# Altium PCB PCB1.PcbDoc
Units mil, origin at the board's own origin, x right, y up, seen from the top; angles counter-clockwise.
Board outline 7111 x 3801 mil, 2 copper layers (Top Layer, Bottom Layer); 57 components, 63 nets, 218 pads, 30 vias.
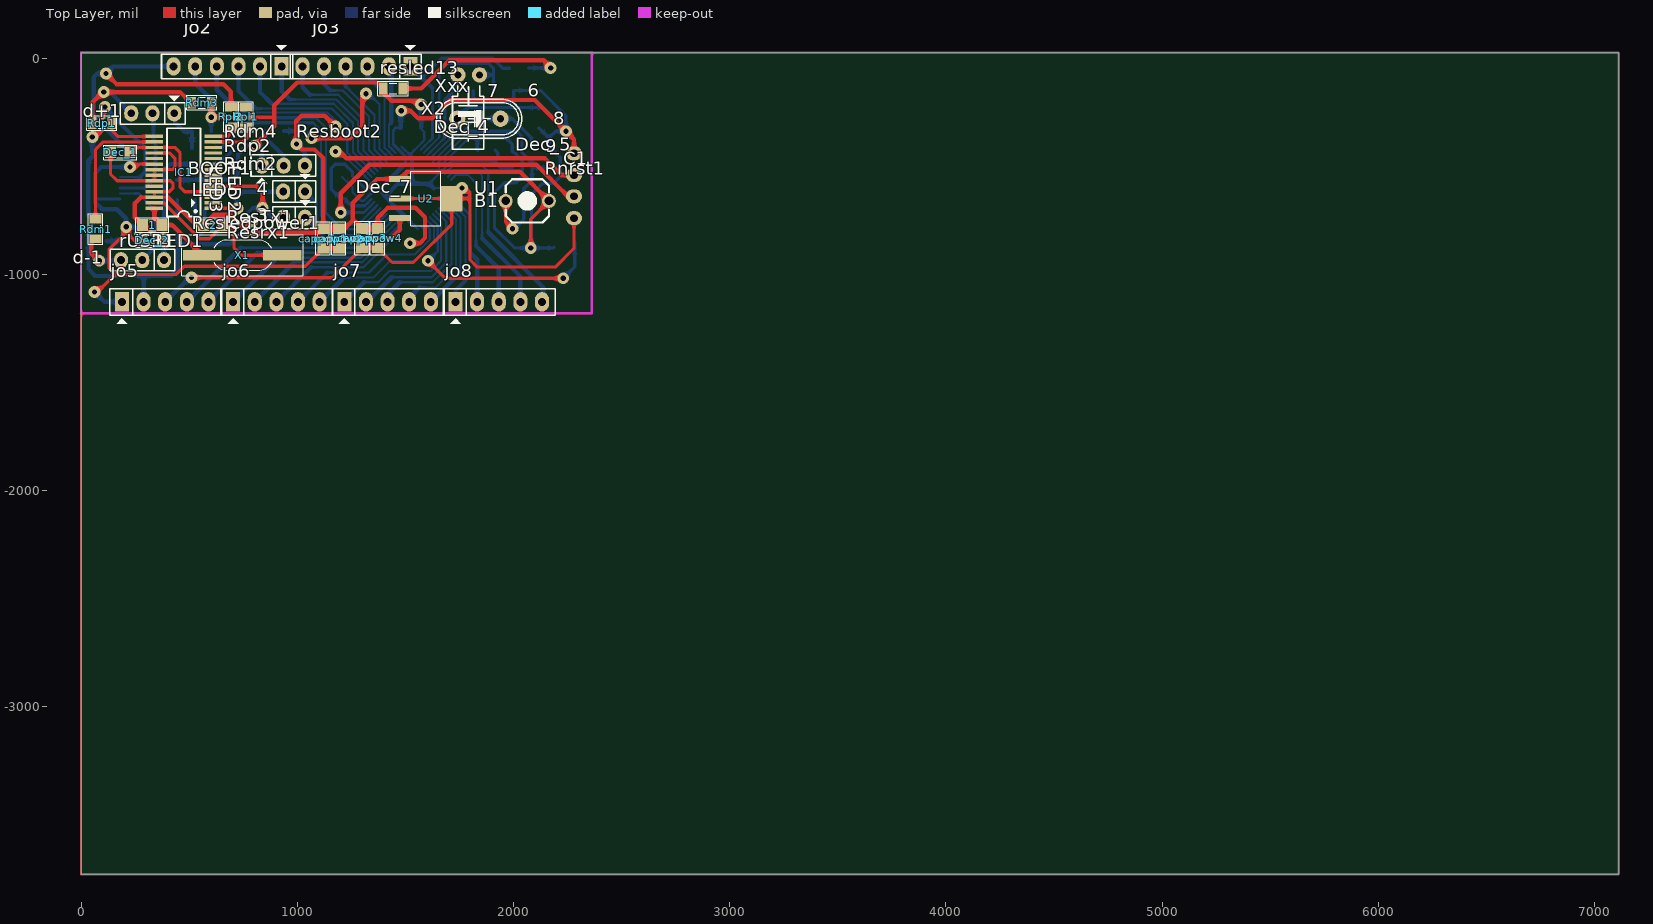
[diagram p0: Top Layer view]
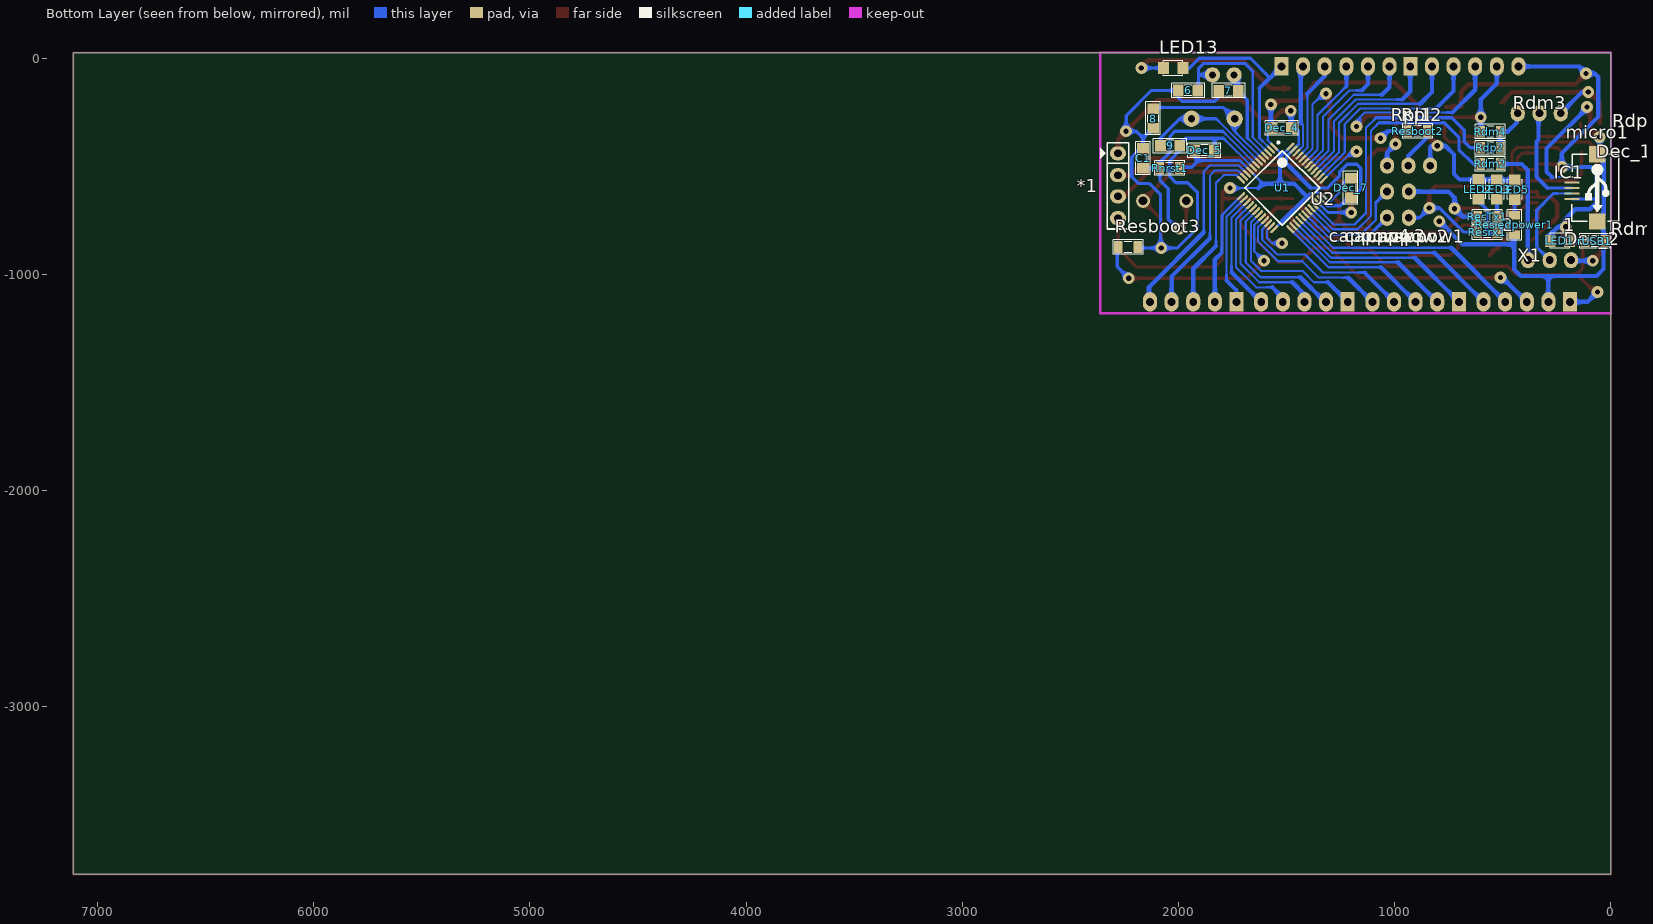
[diagram p1: Bottom Layer view, seen from below]
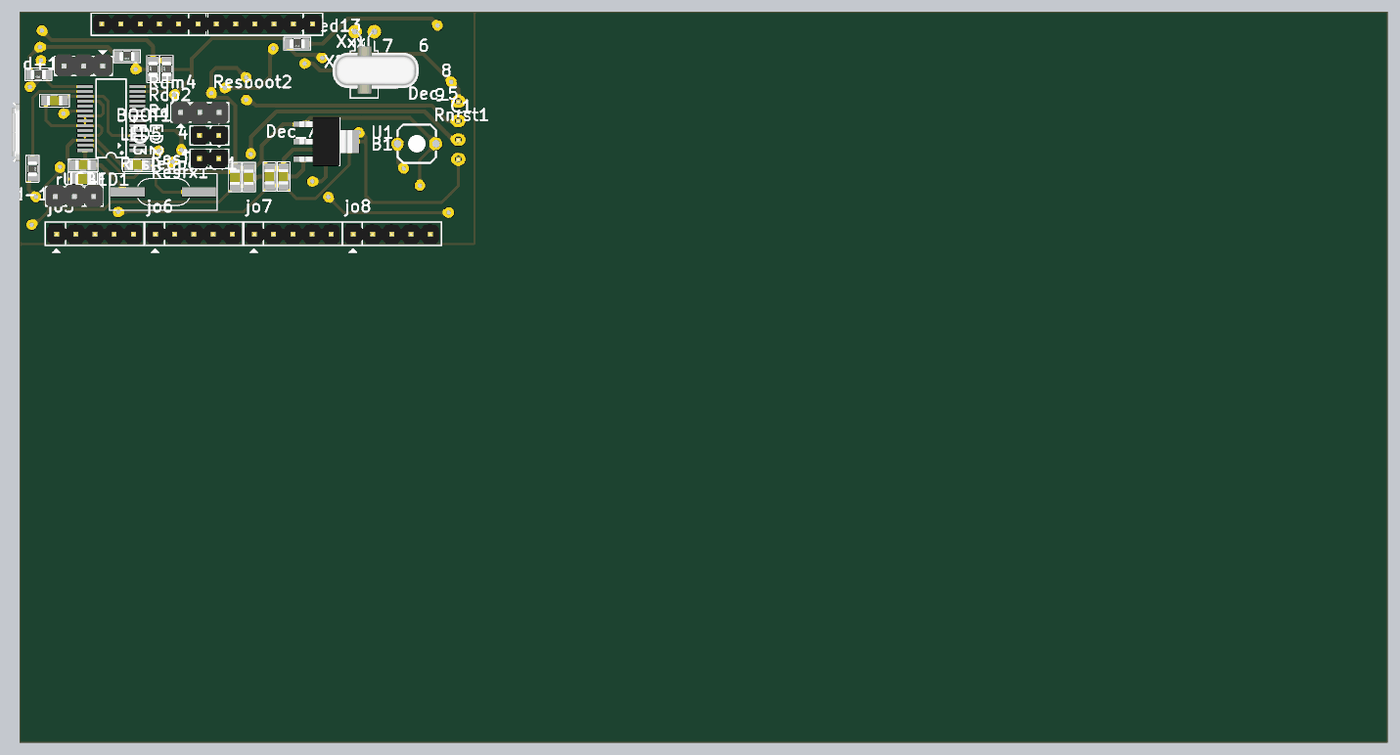
[diagram p2: 3D render of the assembled board from above, using the file's embedded part models]
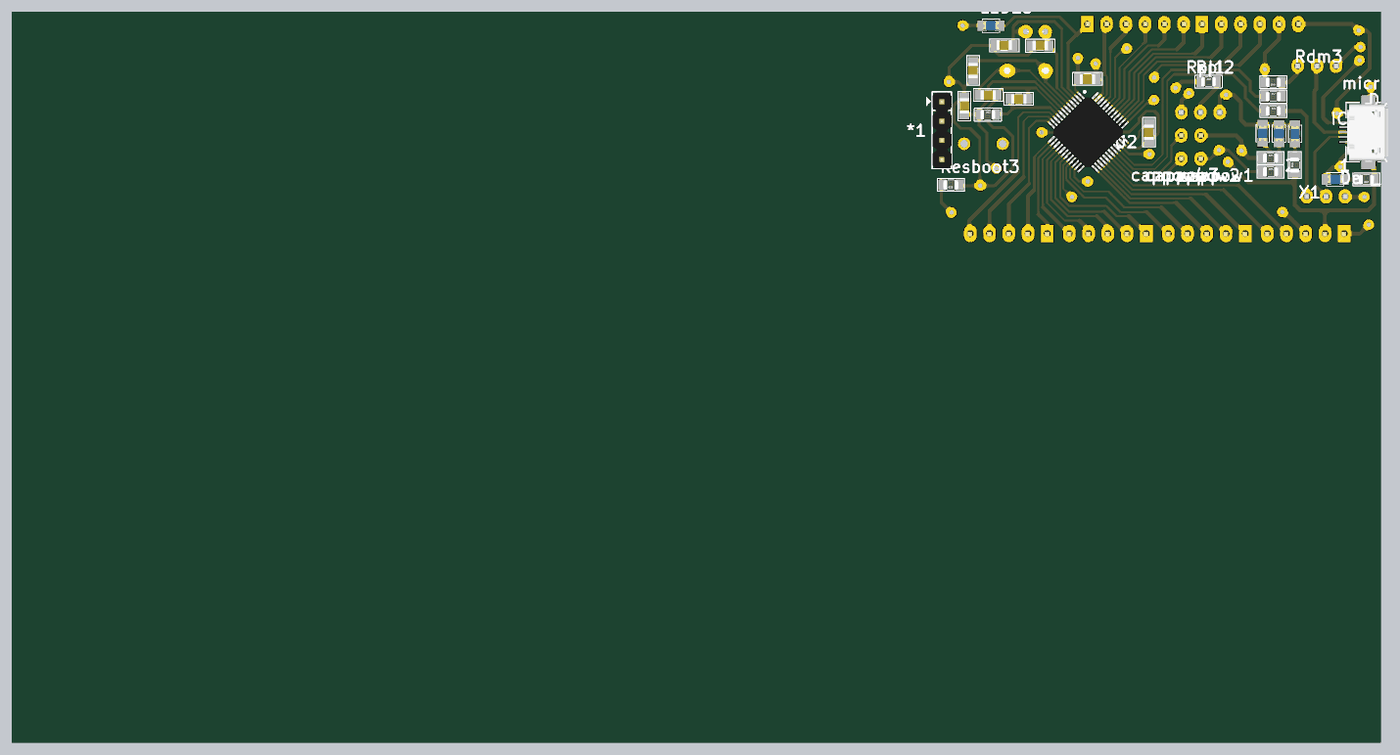
[diagram p3: 3D render of the assembled board from below, using the file's embedded part models]

## Layer stack, top to bottom
Top Solder: solder mask 0.4, Solder Resist, Dk 3.5
Top Layer: signal copper 1.4
Dielectric 1: dielectric 12.6, FR-4, Dk 4.8
Bottom Layer: signal copper 1.4
Bottom Solder: solder mask 0.4, Solder Resist, Dk 3.5

## Board outline
0,-2550 0,26 7111,26 7111,-3775 0,-3775

## Design rules (kind name [scope] priority, off if disabled: settings)
Clearance [All] p1: gap=1
PolygonConnect [All] p1: connectstyle=Relief reliefconductorwidth=10 reliefentries=4 polygonreliefangle="90 Angle" airgapwidth=10
RoomDefinition Sheet1 [InComponentClass('Sheet1')] p1: confinementstyle=ConfineIn formatcopy=TRUE lockcomponents=FALSE outline 2423,274 2691,274 2691,1009 2423,1009
RoutingVias [All] p1: holewidth=24 width=55 viastyle="Through Hole" minholewidth=24 minwidth=55 maxholewidth=24 maxwidth=55
SolderMaskExpansion [All] p1: expansion=4
UnpouredPolygon [All] p1: allowunpoured=FALSE
Width [All] p1: maxlimit=40 minlimit=10 preferedwidth=15
29 further rules are at their usual default settings.

## Components (designator, comment, footprint, x,y, rotation, side; value= is the part's Value field where it differs from the comment)
1 "Tu 0805 22p" "Tu 0805" 329,-772 r180 top
2 "Tu 0805 22p" "Tu 0805" 612,-772 r180 top
3 "Jumper 2" JP2 1036,-738 r180 top
4 "Jumper 2" JP2 1036,-617 r180 top
6 "22p" "Tu 0805" 1956,-149 r0 bottom
7 "22p" "Tu 0805" 1769,-151 r0 bottom
8 "22p" "Tu 0805" 2117,-279 r270 bottom
9 "22p" "Tu 0805" 2039,-405 r180 bottom
*1 "JP4" JP4 2280,-540 r270 bottom
B1 "Button" "Button 2 Pin" 2064,-660 r180 top
BOOT1 "JP 2-1" JP3 936,-497 r0 top
C1 "Tu 0805" "Tu 0805" 2164,-463 r90 bottom
cappow1 "103" "Tu 0805" 1120,-834 r270 top
cappow2 "104" "Tu 0805" 1192.33,-834 r270 top
cappow3 "104" "Tu 0805" 1299.67,-832 r270 top
cappow4 "103" "Tu 0805" 1372,-832 r270 top
d+1 "JP 2-1" JP3 331,-255 r180 top
d-1 "JP 2-1" JP3 284,-934 r180 top
Dec_1 "104" "Tu 0805" 181,-435 r0 top
Dec_2 "104" "Tu 0805" 328,-841 r0 top
Dec_4 "104" "Tu 0805" 1523,-322 r180 bottom
Dec_5 "104" "Tu 0805" 1880,-426 r180 bottom
Dec_7 "104" "Tu 0805" 1203,-600 r270 bottom
IC1 "PL2303HX" SO-G28/C6.8 475,-528 r90 top
jo2 "JP6 PINssc" JP6 928,-38 r180 top
jo3 "JP6 PIN" JP6 1524,-38 r180 top
jo5 "JP5" JP5 189,-1127 r0 top
jo6 "JP5" JP5 703.33,-1127 r0 top
jo7 "JP5" JP5 1217.67,-1127 r0 top
jo8 "JP5" JP5 1732,-1127 r0 top
LED1 "LED SMD" SM-LED-0805-Blue 281,-845 r180 bottom
LED2 "LED SMD" SM-LED-0805-Blue 613,-561 r270 bottom
LED3 "LED SMD" SM-LED-0805-Blue 528,-562 r270 bottom
LED5 "LED SMD" SM-LED-0805-Blue 445,-563 r270 bottom
LED13 "LED SMD" SM-LED-0805-Blue 2070,-46 r180 bottom
micro1 "USB-5" USB-M1 180,-600 r270 bottom
Rdm1 "22" RES-SMD-0805 67,-790 r270 top
Rdm2 "22" RES-SMD-0805 558,-489 r180 bottom
Rdm3 "22" RES-SMD-0805 558,-206 r180 top
Rdm4 "22" RES-SMD-0805 558,-340 r0 bottom
Rdp1 "22" RES-SMD-0805 96,-300 r180 top
Rdp2 "22" RES-SMD-0805 558,-414 r180 bottom
Resboot2 "10k" RES-SMD-0805 894,-337 r180 bottom
Resboot3 "10k" RES-SMD-0805 2233,-874 r0 bottom
resled13 "470" RES-SMD-0805 1443,-140 r180 top
Resledpower1 "470" RES-SMD-0805 447,-771 r90 bottom
Resrx1 "470" RES-SMD-0805 572,-805 r180 bottom
ResTx1 "470" RES-SMD-0805 572,-734 r180 bottom
Rnrst1 "Res" RES-SMD-0805 2041,-508 r180 bottom
Rpl1 "10k" RES-SMD-0805 763,-271 r90 top
Rpl2 "10k" RES-SMD-0805 693,-271 r90 top
rUSB1 "470" RES-SMD-0805 74,-846 r0 bottom
U1 "STM32F101C6T6" TQFP48 1520,-600 r225 bottom
U2 "LM1117-3.3V" LM1117-SOP 1524,-649 r270 top
X1 "12mhz" XT2-SMD 741,-911 r180 top
X2 "32k768" XT32k 1843,-77 r270 top
Xxx "8mhzdip" XT2 1840,-280 r180 top

## Footprints (in the part's own frame and the unit in brackets; to place one, negate y for a bottom-side part, rotate by r counter-clockwise, add the part's x,y. Pads: shape width x height; smd on the part's side, far side on the other; paste and mask are expansions set on the pad)
"Button 2 Pin" [mil] "Button 200mil 2 Pin"
  round 65 hole 40: 1(-100,0) 2(100,0)
  silkscreen extent -100,-100 100,100
JP2 [mil]
  oval 65x75 hole 36: 1(0,0) 2(101,0)
  silkscreen extent -50,-81 150,50, body extent -48,-50 148,48, height 323
JP3 [mil] "Jumper 3"
  oval 65x75 hole 36: 1(-100,0) 2(1,0) 3(99,0)
  silkscreen extent -150,-81 150,50, body extent -150,-60 150,55, height 355
JP4 [mil] "Jumper 4"
  oval 65x75 hole 36: 1(-100,0) 2(1,0) 3(99,0) 4(200,0)
  silkscreen extent -150,-81 250,50, body extent -148,-48 248,50, height 323
JP5 [mil] "JP5"
  rect 65x90 hole 36: 1(0,0)
  oval 65x90 hole 36: 2(100,0) 3(200,0) 4(300,0) 5(400,0)
  silkscreen extent -57,-101 461,60, body extent -48,-53 448,45, height 323
JP6 [mil] "JP6"
  rect 65x85 hole 36: 1(0,0)
  oval 65x85 hole 36: 2(100,0) 3(200,0) 4(300,0) 5(400,0) 6(500,0)
  silkscreen extent -50,-99 556,58, body extent -48,-50 548,48, height 323
LM1117-SOP [mm]
  rect 0.7x2.54 smd: 1(-2.3,-1.27) 2(0,-1.27) 3(2.3,-1.27)
  rect 3x2.54 smd: 2(0,4.826)
  silkscreen extent -3.18,0 3.17,3.56, body extent -3.25,-1.78 3.25,5.18, height 1.68
RES-SMD-0805 [mil]
  rect 39.37x55 smd: 1(-45,0) 2(45,0)
  silkscreen extent -70,-34 70,33, body extent -39,-25 39,25, height 31
SM-LED-0805-Blue [mil]
  rect 50x55 smd: 1(0,0) 2(90,0)
  silkscreen extent 0,-35 90,35, body extent 5,-25 85,25, height 43
SO-G28/C6.8 [mm] "SSOP, Plastic; 28 Leads; Body Width 5.3 mm; Pitch 0.65 mm"
  rect 0.4x2.05 smd: 1(-4.225,-3.451) 2(-3.575,-3.451) 3(-2.925,-3.451) 4(-2.275,-3.451) 5(-1.625,-3.451) 6(-0.975,-3.451) 7(-0.325,-3.451) 8(0.325,-3.451) 9(0.975,-3.451) 10(1.625,-3.451) 11(2.275,-3.451) 12(2.925,-3.451) 13(3.575,-3.451) 14(4.225,-3.451) 15(4.225,3.451) 16(3.575,3.451) 17(2.925,3.451) 18(2.275,3.451) 19(1.625,3.451) 20(0.975,3.451) 21(0.325,3.451) 22(-0.325,3.451) 23(-0.975,3.451) 24(-1.625,3.451) 25(-2.275,3.451) 26(-2.925,3.451) 27(-3.575,3.451) 28(-4.225,3.451)
  silkscreen extent -5.18,-1.97 5.17,1.98, body extent -5.16,-3.45 5.26,3.43, height 1.27
TQFP48 [mm] "TQFP, 48-Leads, Body 7.00x7.00mm, Pitch 0.50mm, IPC High Density"
  oval 1.2x0.3 smd: 1(-4.1,2.75) 2(-4.1,2.25) 3(-4.1,1.75) 4(-4.1,1.25) 5(-4.1,0.75) 6(-4.1,0.25) 7(-4.1,-0.25) 8(-4.1,-0.75) 9(-4.1,-1.25) 10(-4.1,-1.75) 11(-4.1,-2.25) 12(-4.1,-2.75) 25(4.1,-2.75) 26(4.1,-2.25) 27(4.1,-1.75) 28(4.1,-1.25) 29(4.1,-0.75) 30(4.1,-0.25) 31(4.1,0.25) 32(4.1,0.75) 33(4.1,1.25) 34(4.1,1.75) 35(4.1,2.25) 36(4.1,2.75)
  oval 0.3x1.2 smd: 13(-2.75,-4.1) 14(-2.25,-4.1) 15(-1.75,-4.1) 16(-1.25,-4.1) 17(-0.75,-4.1) 18(-0.25,-4.1) 19(0.25,-4.1) 20(0.75,-4.1) 21(1.25,-4.1) 22(1.75,-4.1) 23(2.25,-4.1) 24(2.75,-4.1) 37(2.75,4.1) 38(2.25,4.1) 39(1.75,4.1) 40(1.25,4.1) 41(0.75,4.1) 42(0.25,4.1) 43(-0.25,4.1) 44(-0.75,4.1) 45(-1.25,4.1) 46(-1.75,4.1) 47(-2.25,4.1) 48(-2.75,4.1)
  silkscreen extent -4.22,-3.1 3.1,3.57, body extent -4.5,-4.5 4.5,4.5, height 1.45
"Tu 0805" [mil] "Compoment SMD 80x50mil"
  rect 50x55 smd: 1(-45,0) 2(45,0)
  silkscreen extent -77,-34 76,33, body extent -40,-27 40,23, height 24
USB-M1 [mil]
  rect 10x70 smd: 1(51.18,0) 2(25.59,0) 3(0,0) 4(-25.59,0) 5(-50,0)
  rect 74.8x74.8 smd: 5(-155.51,116.84) 5(155.51,116.84)
  silkscreen extent -155,-1 155,215, body extent -157,5 158,218, height 107
XT2 [mil] "Footpin for Crystal 2 pin"
  round 75 hole 34: 1(-100,0) 2(100,0)
  silkscreen extent -198,-90 195,90, body extent -233,-93 213,90, height 138
XT2-SMD [mm]
  rect 4.5x1.2 smd: 1(-4.826,0) 2(4.572,0)
  silkscreen extent -7.24,-2.41 6.99,2.41, body extent -6.53,-2.41 6.27,2.42, height 4.3
XT32k [mm]
  round 1.8 hole 0.813: 1(0,0) 2(0,-2.54)
  silkscreen extent 1.27,-3.17 8.76,0.51, body extent -0.15,-2.42 8.2,-0.12, height 1.95

## Part data
1 2 6 7 8 9 C1 cappow1 cappow2 cappow3 cappow4 Dec_1 Dec_2 Dec_4 Dec_5 Dec_7: library part "CAP 0805"
3 4: library part "JP 2"
B1: library part "Button 2 Pin", "Button 2 pin"
BOOT1 d+1 d-1: library part "JP 2-1_1", "Jumper 2-1"
IC1: "USB - RS232 Converter"
jo2: library part JP6, "JP6 PIN"
jo3: library part JP6
LED1 LED2 LED3 LED5 LED13: library part LED-SMD-0805
Rdm1 Rdm2 Rdm3 Rdm4 Rdp1 Rdp2 Resboot2 Resboot3 resled13 Resledpower1 Resrx1 ResTx1 Rnrst1 Rpl1 Rpl2 rUSB1: library part Res-SMD, "Resistor"
U1: "STM32 ARM-based 32-bit MCU with 32 Kbytes Flash, 48-pin LQFP, Industrial Temperature"
U2: library part LM1117, "800mA Low-Dropout Linear Regulator"
X1 X2: library part XT2, "Crystal, 32.768 KHz, -40 to 85 degC, 3.2 x 1.5 x 0.9 mm SMD"
Xxx: library part XT2, "Crystal For all Crystal 2pin."

## Via types
v1: diameter 55, hole 24, Top Layer to Bottom Layer, 30 vias

## Nets (pads, with @x,y where several pads share a name; then routed paths per layer and width w, separated by ;. In a path a pad name is that pad's centre, name@x,y a point inside that pad or via, vN(x,y) a via of type N, cw(c..) or ccw(c..) an arc to the next point about the centre after c; other vN are vias at no path point)
3V3: *1.4 BOOT1.1 cappow3.2 cappow4.2 Dec_4.1 Dec_5.1 Dec_7.1 jo2.5 jo5.3 LED2.1 LED3.1 LED5.1 Rdm3.1 Rdm4.2 resled13.2 Rnrst1.2 U1.1 U1.9 U1.24 U1.36 U1.48 U2.2 | length 7143.7
  Top Layer w10: v1(602,-273) 603,-272 Rdm3.1 ; 1370,-112 resled13.2 resled13.2@1398,-159
  Top Layer w15: v1(511,-1015) 1161.67,-1015 cappow3.2 cappow4.2 1440,-945 1536,-945 1714,-767 U2.2@1714,-649 ; v1(602,-273) 895,-273 ; U2.2@1472,-651 1474,-649 U2.2@1714,-649 ; v1(1762,-601) 1777,-601 1799,-623 1799,-932 1833,-966 2194,-966 2280,-880 *1.4 ; 1799,-649 U2.2@1714,-649
  Top Layer w20: v1(803,-405) 894,-314 894,-218 1000,-112 1370,-112 ; resled13.2@1398,-159 1436,-197 1556,-197 v1(1573,-214)
  Bottom Layer w10: LED3.1@527,-563 LED3.1 ; Rdm4.2@602,-339 Rdm4.2 ; LED2.1@612,-562 LED2.1 ; Dec_7.1@1208,-550 1256,-598 1256,-620.89 1294.11,-659 1307.89,-659 U1.36 1345.89,-621 1387.89,-621 1406.44,-639.56 ; U1.48 1520.11,-447 ; 1522.94,-756.06 U1.24 ; 1531,-457.89 1520.11,-447 ; Dec_4.1@1573,-317 Dec_4.1 1587,-341 1587,-379.89 U1.1 1534.89,-432 1535.11,-432 1520.11,-447 ; 1609.6,-580 U1.9 1716.6,-473 ; 1630.6,-601 1631.6,-600 1632.6,-601 v1(1762,-601)
  Bottom Layer w15: Rdm4.2@602,-339 v1(602,-273) ; 1716.6,-473 1908,-473 ; Dec_5.1@1915,-425 1927,-437 1927,-454 1908,-473 ; Rnrst1.2@1996,-504 1939,-504 1908,-473
  Bottom Layer w20: jo5.3 501,-1015 v1(511,-1015) ; LED5.1 LED3.1@527,-563 ; LED3.1 LED2.1@612,-562 ; jo2.5 528,-117 602,-191 v1(602,-273) ; LED2.1 700,-561 726,-535 726,-445 766,-405 v1(803,-405) 829,-405 836,-412 BOOT1.1 ; 1522.94,-756.06 1406.44,-639.56 1466.02,-580 1531,-580 ; 1531,-457.89 1531,-580 ; Dec_4.1@1573,-317 v1(1573,-214) ; 1630.6,-601 1609.6,-580 1531,-580
5V: cappow1.2 cappow2.2 Dec_2.1 IC1.20 jo2.6 jo5.1 LED1.1 micro1.1 Rpl1.2 Rpl2.2 U2.3 | length 4577.8
  Top Layer w15: v1(62,-1081) 77,-1081 158,-1000 ; v1(209,-780) v1@209,-805 ; v1(227,-503) 254,-503 267.39,-489.61 IC1.20 ; Dec_2.1 280,-844 248,-844 v1@209,-805 ; cappow2.2 cappow1.2 1037,-962 478,-962 440,-1000 158,-1000 ; 158,-1000 130,-972 130,-884 v1@209,-805
  Top Layer w20: v1(115,-71) 164,-120 658,-120 693,-155 Rpl2.2 Rpl1.2 ; cappow2.2 1240.33,-831 1437,-831 1474,-794 U2.3
  Bottom Layer w15: 66,-651.18 micro1.1
  Bottom Layer w20: v1(62,-1081) 108,-1127 jo5.1 ; 66,-651.18 66,-667 98,-699 165,-699 209,-743 v1(209,-780) 245,-780 283,-818 283,-843 LED1.1 ; 66,-643 66,-531 94,-503 v1(227,-503) 227,-439 58,-270 58,-88 75,-71 v1(115,-71) 148,-38 jo2.6
BOOT0: Resboot2.1 U1.44 | length 909
  Top Layer w15: v1@1301,-181 v1(1318,-164)
  Top Layer w20: v1(1066,-370) 1244,-370 1301,-313 v1@1301,-181
  Bottom Layer w10: v1(1318,-164) 1331,-164 1380,-213 1380,-418.24 U1.44
  Bottom Layer w20: Resboot2.1 1033,-337 v1(1066,-370)
BOOT1: Resboot3.2 U1.20 | length 1086.9
  Top Layer w15: v1(1604,-937) 1685,-1018 v1(2230,-1018)
  Bottom Layer w10: v1(1604,-937) 1606,-937 1650,-893 1650,-771.76 U1.20
  Bottom Layer w15: v1(2230,-1018) 2283,-965 Resboot3.2@2283,-850
D+: d+1.2 micro1.3 | length 482.9
  Bottom Layer w15: micro1.3 293,-600
  Bottom Layer w20: 293,-600 344,-549 344,-386 335,-377 d+1.2@335,-255
D-: d-1.2 micro1.2 | length 450.9
  Bottom Layer w10: micro1.2 265.59,-625.59
  Bottom Layer w15: 265.59,-625.59 343,-703 343,-874 d-1.2
GND: 1.2 2.2 6.2 7.2 8.2 9.2 *1.1 B1.1 BOOT1.3 C1.2 cappow1.1 cappow2.1 cappow3.1 cappow4.1 Dec_1.1 Dec_2.2 Dec_4.2 Dec_5.2 Dec_7.2 IC1.18 IC1.21 IC1.22 IC1.23 IC1.25 IC1.26 jo2.4 jo5.2 micro1.5 Resboot3.1 Resledpower1.1 rUSB1.1 U1.8 U1.23 U1.35 U1.47 U2.1 | length 13252.4
  Top Layer w10: v1(52,-364) 53,-365 v1@65,-365 ; 1.2 1.2@294,-772 ; IC1.25 IC1.26 402.16,-643.16 ; IC1.23 IC1.22 IC1.21 ; Dec_2.2@363,-841 Dec_2.2 ; cappow2.1@1210,-789 cappow2.1 cappow2.1@1218,-789 ; 1257,-750 1262.67,-750
  Top Layer w15: Dec_1.1 136,-536 166.39,-566.39 IC1.23 413.39,-566.39 425,-578 425,-601 408.43,-617.57 IC1.25 ; 276.84,-643.16 IC1.26 ; 1.2@294,-772 Dec_2.2@363,-841 ; IC1.21 422.8,-515.2 434,-504 434,-462 410.43,-438.43 IC1.18 ; v1(2080,-878) 2080,-744 B1.1
  Top Layer w20: v1@65,-365 96,-334 96,-240 v1(110,-226) ; 276.84,-643.16 249,-671 249,-737 1.2 ; 402.16,-643.16 531,-772 2.2 615,-724 689,-724 756.5,-791.5 ; v1(794,-754) 757,-791 773,-807 1102,-807 cappow1.1 ; v1(1177,-316) 1127,-266 1019,-266 996,-289 v1(996,-397) 1021,-422 1080,-422 1120,-462 cappow1.1 ; cappow2.1 cappow1.1 ; cappow2.1@1218,-789 1257,-750 1257,-670 1368.55,-558.45 U2.1 1506.95,-525.5 2029.5,-525.5 B1.1 ; 1262.67,-750 cappow3.1 cappow4.1 1372,-738 1419,-691 1546,-691 1591,-736 1591,-832 1567,-856 v1(1521,-856) ; v1(1481,-243) 1524,-243 1559,-278 1623,-278 1708,-193 2098,-193 v1(2243,-338) 2280,-375 *1.1
  Bottom Layer w10: v1@110,-230 v1(110,-226) ; micro1.5@180,-550 273,-550 ; jo5.2 jo5.2@290,-1126 ; 733,-251 1138,-251 1177,-290 v1(1177,-316) ; 1311.73,-683 U1.35 ; 1444,-398.73 1444,-334 1456,-322 Dec_4.2 ; v1@1478,-246 v1(1481,-243) ; v1(1521,-856) 1566,-856 1591,-831 1591,-796.28 U1.23 ; U1.8 1791.76,-370
  Bottom Layer w15: 1311.73,-683 1251,-683 1216.5,-648.5 1199.5,-648.5 1157,-606 1157,-509 1175,-491 1220,-491 1256,-527 1256,-547 1309,-600 1388,-600 ; 1444,-398.73 1501.14,-455.86 1501.14,-486.86 1485.5,-502.5 ; 1791.76,-370 1833,-370 ; 7.2 1814,-180 1833,-199 1984,-199 2001,-182 6.2 2125,-149 2242,-266 2242,-337 v1(2243,-338) 2195,-338 2164,-369 ; Dec_5.2 1833,-424 1833,-370 ; 9.2@1993,-405 1993,-396 1967,-370 1833,-370 ; 9.2 1994,-427 2041,-474 2041,-547 2012,-576 1958,-576 1912,-622 1912,-785 2005,-878 v1(2080,-878) ; 8.2 2119,-324 2164,-369 ; Resboot3.1 2184,-878 v1(2080,-878) ; v1(2080,-878) 2083,-875 2083,-631 2134,-580 2184,-580 2216,-548 2216,-459 2175,-418 C1.2 2164,-369
  Bottom Layer w20: v1(52,-364) 52,-433.33 63.16,-444.49 33,-474.65 33,-725.35 63.16,-755.51 34,-784.67 34,-975 66,-1007 290,-1007 ; v1@110,-230 298,-418 298,-525 273,-550 ; jo5.2@290,-1126 290,-1007 ; Resledpower1.1 447,-861 ; jo2.4 628,-146 733,-251 ; v1(794,-754) 687,-861 447,-861 ; v1(996,-397) 1035,-436 BOOT1.3 ; 1388,-600 1485.5,-502.5 ; Dec_4.2 v1@1478,-246 ; 290,-1007 417,-1007 447,-977 447,-861
LEDSIGN: jo3.1 LED13.2 U1.2 | length 913.2
  Bottom Layer w10: U1.2 1625,-369.72 ; 1584,-98 1584,-83
  Bottom Layer w15: 1584,-83 1667,0 1904,0 1950,-46 LED13.2 ; 1625,-369.72 1625,-138
  Bottom Layer w20: jo3.1 1584,-98 ; 1585,-98 1625,-138
Net1_1: 1.1 IC1.28 X1.2 | length 336.7
  Top Layer w20: IC1.28 339.14,-737.14 1.1 422,-772 X1.2
Net2_1: 2.1 IC1.27 X1.1 | length 793
  Top Layer w15: IC1.27 382.75,-668.75 549,-835 594,-835 2.1 686,-772 707,-793 707,-876 742,-911 X1.1
Net3_1: 3.1 U1.30 | length 472.5
  Bottom Layer w10: 1143,-845 1288.92,-845 U1.30
  Bottom Layer w15: 3.1 1143,-845
Net4_1: 4.1 U1.31 | length 538.3
  Bottom Layer w10: 1088,-669 1088,-748 1158,-818 1288,-818 1368,-738 1368.08,-738 U1.31
  Bottom Layer w15: 4.1 1088,-669
Net6_1: 6.1 U1.3 X2.1 | length 849.1
  Bottom Layer w10: U1.3 1657,-365.56 1657,-61
  Bottom Layer w15: 1657,-61 1694,-24 1883,-24 1908,-49 1908,-78 ; X2.1 1907,-77 1908,-78 ; 6.1 1908,-146 1908,-78
Net7_1: 7.1 U1.4 X2.2 | length 433.6
  Bottom Layer w10: U1.4 1682,-368.4
  Bottom Layer w15: 1682,-368.4 1682,-193 7.1 1724,-96 X2.2
NetBOOT1_2: BOOT1.2 Resboot2.2 | length 196.5
  Bottom Layer w20: Resboot2.2 849,-365 937,-453 BOOT1.2
Netd+1_1: d+1.1 Rdm4.1 Rdp2.2 | length 211.8
  Bottom Layer w20: d+1.1@435,-255 435,-297 478,-340 Rdm4.1 Rdp2.2
Netd+1_3: d+1.3 Rdm3.2 Rdp1.2 | length 756.8
  Top Layer w10: Rdm3.2@505,-206 Rdm3.2@505,-205
  Top Layer w20: Rdp1.2 51,-206 100,-157 457,-157 Rdm3.2@505,-205
  Bottom Layer w20: v1(105,-157) 134,-157 d+1.3
Netd-1_1: d-1.1 Rdm2.2 | length 557
  Bottom Layer w20: d-1.1 384,-518 413,-489 Rdm2.2
Netd-1_3: d-1.3 Rdm1.2 | length 231.2
  Top Layer w20: Rdm1.2 47,-855 47,-900 v1(84,-937)
  Bottom Layer w10: d-1.3@174,-937 181,-930 d-1.3
  Bottom Layer w20: v1(84,-937) d-1.3@174,-937
NetIC1_13: IC1.13 Rpl1.1 | length 222.4
  Top Layer w15: IC1.13 747.75,-387.25 770,-365 Rpl1.1@770,-311
NetIC1_14: IC1.14 Rpl2.1 | length 119.8
  Top Layer w15: IC1.14 679.34,-361.66 693,-348 Rpl2.1
NetLED1_2: LED1.2 rUSB1.2 | length 72.4
  Bottom Layer w10: LED1.2@190,-846 LED1.2
  Bottom Layer w20: rUSB1.2 LED1.2@190,-846
NetLED2_2: LED2.2 Resrx1.2 | length 208.4
  Bottom Layer w10: LED2.2@613,-660 LED2.2
  Bottom Layer w15: Resrx1.2@534,-812 559,-812 572,-799 572,-701 LED2.2@613,-660
NetLED3_2: LED3.2 ResTx1.2 | length 82.4
  Bottom Layer w10: LED3.2@527,-653 LED3.2
  Bottom Layer w15: ResTx1.2 LED3.2@527,-653
NetLED5_2: LED5.2 Resledpower1.2 | length 73.8
  Bottom Layer w10: Resledpower1.2@445,-724 Resledpower1.2
  Bottom Layer w15: Resledpower1.2@445,-724 LED5.2
NetLED13_1: LED13.1 resled13.1 | length 855.4
  Top Layer w20: resled13.1 1573,-140 1704,-9 2140,-9 v1(2172,-45)
  Bottom Layer w15: LED13.1@2071,-45 v1(2172,-45)
OSC_IN: 8.1 U1.5 Xxx.2 | length 638.9
  Bottom Layer w10: U1.5 1741,-337.24
  Bottom Layer w15: Xxx.2 1792,-228 2111,-228 8.1 ; 1741,-337.24 Xxx.2@1741,-280
OSC_OUT: 9.1 U1.6 Xxx.1 | length 611.7
  Bottom Layer w10: U1.6 1826.08,-280
  Bottom Layer w15: 1826.08,-280 Xxx.1 1995,-280 2083,-368 9.1@2083,-405
PA0: jo8.5 U1.10 | length 900.9
  Bottom Layer w10: U1.10 1721.44,-496 1855,-496 1883,-524 1883,-805
  Bottom Layer w20: 1883,-805 2137,-1059 jo8.5@2137,-1092
PA1: jo8.4 U1.11 | length 837.7
  Bottom Layer w10: U1.11 1726.27,-519 1831,-519 1855,-543 1855,-833
  Bottom Layer w20: 1855,-833 2032,-1010 jo8.4
PA2: jo8.3 U1.12 | length 733.6
  Bottom Layer w10: U1.12 1732.11,-541 1791,-541 1827,-577 1827,-869
  Bottom Layer w20: 1827,-869 1932,-974 jo8.3
PA3: jo8.2 U1.13 | length 884.3
  Bottom Layer w10: 1801,-901 1801,-727.89 U1.13 1797,-723.89 1797,-897 1832,-932
  Bottom Layer w20: 1801,-901 1832,-932 jo8.2
PA4: jo8.1 U1.14 | length 528.2
  Bottom Layer w10: U1.14 1778,-732.73 1778,-1028
  Bottom Layer w20: jo8.1 1732,-1074 1778,-1028
PA5: jo7.5 U1.15 | length 548.3
  Bottom Layer w10: U1.15 1755,-737.56 1755,-989.67
  Bottom Layer w20: jo7.5 1755,-989.67
PA6: jo7.4 U1.16 | length 608.2
  Bottom Layer w10: jo7.4 jo7.4@1517.67,-1108.33 ; 1566,-1060 1641,-1060 1734,-967 1734,-744.4 U1.16
  Bottom Layer w20: jo7.4@1517.67,-1108.33 1566,-1060
PA7: jo7.3 U1.17 | length 669.7
  Bottom Layer w10: jo7.3 jo7.3@1417.67,-1092.33 ; 1474,-1036 1627,-1036 1713,-950 1713,-751.24 U1.17
  Bottom Layer w20: jo7.3@1417.67,-1092.33 1474,-1036
PA8: jo5.4 U1.29 | length 1100.1
  Bottom Layer w10: 739,-877 1284.76,-877 U1.29
  Bottom Layer w20: jo5.4 739,-877
PA15: jo2.3 U1.38 | length 970.9
  Bottom Layer w10: 809,-233 1160,-233 1231,-304 1231,-436.27 U1.38
  Bottom Layer w20: jo2.3 728,-152 809,-233
PB0: jo7.2 U1.18 | length 704.4
  Bottom Layer w10: jo7.2 jo7.2@1323,-1127 ; 1437,-1013 1621,-1013 1689,-945 1689,-755.08 U1.18
  Bottom Layer w20: jo7.2@1323,-1127 1437,-1013
PB1: jo7.1 U1.19 | length 757.6
  Bottom Layer w10: 1308.67,-1036 1374,-1036 1426,-984 1618,-984 1665,-937 1665,-758.92 U1.19
  Bottom Layer w20: jo7.1 1308.67,-1036
PB3: jo2.2 U1.39 | length 883.9
  Bottom Layer w10: 882,-211 1169,-211 1258,-300 1258,-435.44 U1.39
  Bottom Layer w20: jo2.2 828,-157 882,-211
PB4: jo2.1 U1.40 | length 792.7
  Bottom Layer w10: 965,-191 1181,-191 1281,-291 1281,-430.6 U1.40
  Bottom Layer w20: jo2.1 928,-154 965,-191
PB5: jo3.6 U1.41 | length 695
  Bottom Layer w10: 1059,-169 1190,-169 1306,-285 1306,-427.76 U1.41
  Bottom Layer w20: jo3.6 1024,-134 1059,-169
PB6: jo3.5 U1.42 | length 602.1
  Bottom Layer w10: 1153,-149 1210,-149 1332,-271 1332,-425.92 U1.42
  Bottom Layer w20: jo3.5 1124,-120 1153,-149
PB7: jo3.4 U1.43 | length 519.9
  Bottom Layer w10: 1223,-129 1357,-263 1357,-423.08 U1.43 ; jo3.4@1223,-39 jo3.4
  Bottom Layer w20: 1223,-129 jo3.4@1223,-39
PB8: jo3.3 U1.45 | length 461.4
  Bottom Layer w10: 1404,-163 1404,-414.4 U1.45
  Bottom Layer w20: jo3.3 1324,-83 1404,-163
PB9: jo3.2 U1.46 | length 420.9
  Bottom Layer w10: 1435,-299 1424,-310 1424,-406.56 U1.46
  Bottom Layer w20: jo3.2 1435,-49 1435,-299
PB10: jo6.5 U1.21 | length 757.1
  Bottom Layer w10: 1215.33,-1015 1351,-1015 1427,-939 1540,-939 1633,-846 1633,-782.6 U1.21
  Bottom Layer w20: jo6.5 1215.33,-1015
PB11: jo6.4 U1.22 | length 816.5
  Bottom Layer w10: 1139.33,-991 1332,-991 1415,-908 1544,-908 1613,-839 1613,-790.44 U1.22
  Bottom Layer w20: jo6.4 1139.33,-991
PB12: jo6.3 U1.25 | length 718.4
  Bottom Layer w10: 1063.33,-967 1306.11,-967 U1.25
  Bottom Layer w20: jo6.3 1063.33,-967
PB13: jo6.2 U1.26 | length 810.2
  Bottom Layer w10: 986.33,-944 1301.28,-944 U1.26
  Bottom Layer w20: jo6.2 986.33,-944
PB14: jo6.1 U1.27 | length 902.1
  Bottom Layer w10: 907.33,-923 1294.44,-923 U1.27
  Bottom Layer w20: jo6.1 907.33,-923
PB15: jo5.5 U1.28 | length 1008.3
  Bottom Layer w10: 816,-900 1289.6,-900 U1.28
  Bottom Layer w20: jo5.5 816,-900
PL_DM: IC1.16 Rdm1.1 | length 609.5
  Top Layer w15: Rdm1.1 67,-422 101.75,-387.25 IC1.16
PL_PM: IC1.15 Rdp1.1 | length 243.6
  Top Layer w15: Rdp1.1 141,-334 168.66,-361.66 IC1.15
RESET: B1.2 C1.1 Rnrst1.1 U1.7 | length 1180.7
  Top Layer w15: B1.2 1964,-757 v1(1996,-789)
  Bottom Layer w10: U1.7 1795.92,-338
  Bottom Layer w15: 1795.92,-338 2017,-338 2039,-360 2039,-435 2086,-482 Rnrst1.1 ; v1(1996,-789) 2002,-789 2047,-744 2047,-603 2086,-564 Rnrst1.1 ; C1.1 Rnrst1.1
RX: 3.2 IC1.5 Resrx1.1 | length 702
  Top Layer w15: IC1.5 810.98,-591.98
  Top Layer w20: 810.98,-591.98 840,-621 v1(840,-693)
  Bottom Layer w15: Resrx1.1@617,-819 632,-804 680,-804 791,-693 v1(840,-693) 885,-738 3.2
SWDCLK: *1.2 U1.37 | length 1354.5
  Top Layer w10: v1(1177,-432) v1@1197,-432
  Top Layer w20: v1@1197,-432 1227,-462 2144,-462 2223,-541 *1.2
  Bottom Layer w10: v1(1177,-432) 1198.89,-432 U1.37
SWDIO: *1.3 U1.34 | length 1461.1
  Top Layer w10: *1.3@2252,-639 *1.3
  Top Layer w20: v1(1201,-714) 1201,-625 1333,-493 2106,-493 *1.3@2252,-639
  Bottom Layer w10: 1304,-714 1306,-716 1356.58,-665.42 U1.34
  Bottom Layer w15: v1(1201,-714) 1304,-714
TX: 4.2 IC1.1 ResTx1.1 | length 510.8
  Top Layer w15: IC1.1 v1@723,-694.34 ; v1(723,-696) v1@724.66,-694.34
  Bottom Layer w20: ResTx1.1 685,-734 v1(723,-696) 723,-645 751,-617 4.2
USB_DM: Rdm2.1 U1.32 | length 1370
  Bottom Layer w10: 1073,-298 1109,-334 1109,-728 1172,-791 1287.24,-791 U1.32
  Bottom Layer w15: Rdm2.1 637,-489 703,-423 703,-366 771,-298 1073,-298
USB_DP: Rdp2.1 U1.33 | length 1329.2
  Bottom Layer w10: 1086,-275 1133,-322 1133,-716 1186,-769 1281.4,-769 U1.33
  Bottom Layer w15: Rdp2.1 650,-414 678,-386 678,-333 736,-275 1086,-275
VCCPL: Dec_1.2 IC1.4 IC1.17 | length 572
  Top Layer w15: Dec_1.2 248.16,-412.84 IC1.17 432.84,-412.84 458,-438 458,-597 478.57,-617.57 IC1.4
pads on no net: IC1.2 IC1.3 IC1.6 IC1.7 IC1.8 IC1.9 IC1.10 IC1.11 IC1.12 IC1.19 IC1.24 micro1.4
copper on no net: | length 25393.6
  Top Layer w10: 2363,26 2363,-1180.31 2362.2,-1181.1 0,-1181.1 ; 0,-1181.1 0,26 2362.2,26 7111,26 7111,-3775 0,-3775 0,-2550 0,-1368 0,-1181.1

## Keep-outs
Keep-Out Layer:
  lines w10: 0,-1180 2361,-1180 2362,-1181 2362,26 0,26 0,-1180